# EAGLE board DWM1000_Feather (EAGLE 9.5.0)
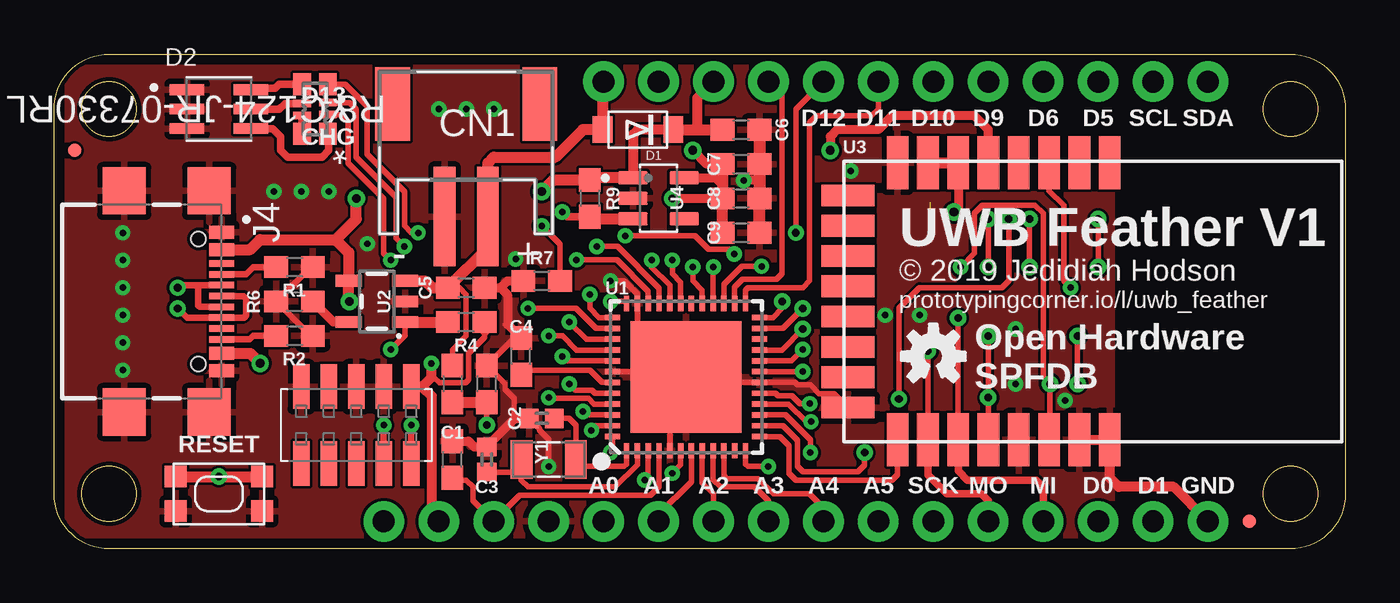
[diagram p0: board, top side]
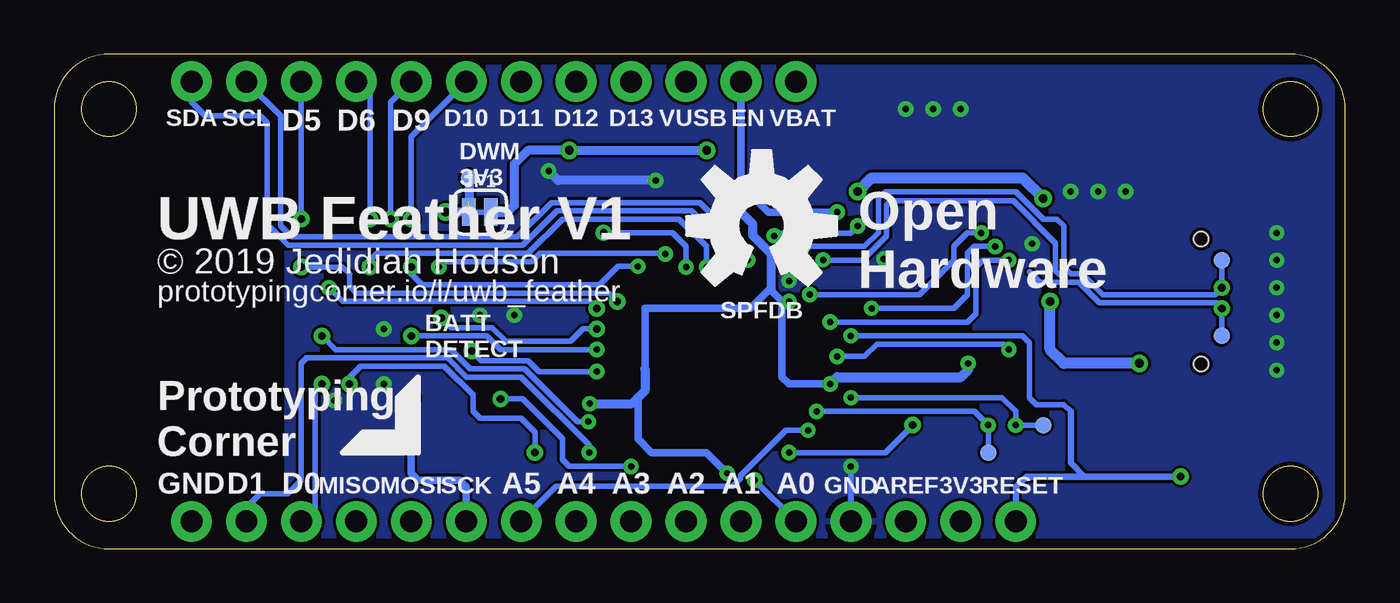
[diagram p1: board, bottom side, seen from below]

Size 59.69 x 22.86 mm. Coordinates in mm from the lower left corner, seen from the top.
Outline: 0,2.54 0,20.32 arc-90 2.54,22.86 57.15,22.86 arc-90 59.69,20.32 59.69,2.54 arc-90 57.15,0 2.54,0 arc-90 0,2.54
Outline: circle at 57.15,20.32 radius 1.27
Outline: circle at 57.15,2.54 radius 1.27
Outline: circle at 2.54,2.54 radius 1.27
Outline: circle at 2.54,20.32 radius 1.27
Copper layers (1*16): Top 0.035mm / dielectric 1.5mm / Bottom 0.035mm
Design rules "JLCPCB_DRU": minimum track width 5mil, minimum drill 0.2mm, track to track 5mil, track to pad 5mil, pad to pad 5mil, via to via 5mil, smd to smd 3.5mil, copper to edge 0.2mm, drill to drill 8mil, minimum pad ring 10mil, minimum via ring 8mil, stop-mask expansion 4mil, vias tented up to drill 40mil, thermal gap 10mil

## Footprints (pad centres in the part's own frame; a part is rotated, then mirrored left to right if it is on the bottom)
0603 = smd 1.1 x 1: 1 -0.85,0; 2 0.85,0
0402 = smd 0.85 x 0.9: 1 -0.58,0; 2 0.58,0
JST-PH-2-SMT-RA = smd 1 x 4.6: 1 1,-3.7; 2 -1,-3.7 | smd 1.6 x 3.4: NC1 -3.4,1.5; NC2 3.4,1.5
SOD-123FL = smd 0.91 x 1.22: A 1.637,0; C -1.637,0
LED_ASMT-YTD7-0AA02 = smd 1.6 x 0.5: 1 -1.475,0.9; 2 -1.475,0; 3 -1.475,-0.9; 4 1.475,-0.9; 5 1.475,0; 6 1.475,0.9
FIDUCIAL-MICRO = smd 0.635 x 0.635: 1 0,0
1X16_NO_SILK = drill 1.016 pad 1.88: 1 0,0; 2 2.54,0; 3 5.08,0; 4 7.62,0; 5 10.16,0; 6 12.7,0; 7 15.24,0; 8 17.78,0; 9 20.32,0; 10 22.86,0; 11 25.4,0; 12 27.94,0; 13 30.48,0; 14 33.02,0; 15 35.56,0; 16 38.1,0
1X12_NO_SILK = drill 1.016 pad 1.88: 1 0,0; 2 2.54,0; 3 5.08,0; 4 7.62,0; 5 10.16,0; 6 12.7,0; 7 15.24,0; 8 17.78,0; 9 20.32,0; 10 22.86,0; 11 25.4,0; 12 27.94,0
GCT_USB4110-GF-A = smd 0.6 x 1.15: A1/B12 -3.2,1.075; A4/B9 -2.4,1.075; B1/A12 3.2,1.075; B4/A9 2.4,1.075 | smd 0.3 x 1.15: A5 -1.25,1.075; A6 -0.25,1.075; A7 0.25,1.075; A8 1.25,1.075; B5 1.75,1.075; B6 0.75,1.075; B7 -0.75,1.075; B8 -1.75,1.075 | smd 2.18 x 2: S1 -5.11,0.5; S2 5.11,0.5; S3 -5.11,-3.43; S4 5.11,-3.43 | hole 0.65: -2.89,0; 2.89,0
SMT-JUMPER_2_NC_TRACE_SILK = smd 0.635 x 1.27: 1 -0.508,0; 2 0.508,0
20021221-00010C4LF = smd 0.76 x 2.05: 1 -2.54,-1.78; 2 -2.54,1.78; 3 -1.27,-1.78; 4 -1.27,1.78; 5 0,-1.78; 6 0,1.78; 7 1.27,-1.78; 8 1.27,1.78; 9 2.54,-1.78; 10 2.54,1.78
YAG_YC124 = smd 0.813 x 1.016: 1 -0.597,1.143; 4 -0.597,-1.143; 5 0.597,-1.143; 8 0.597,1.143 | smd 0.813 x 0.356: 2 -0.597,0.257; 3 -0.597,-0.298; 6 0.597,-0.257; 7 0.597,0.298
KMR2 = smd 1 x 1: 1 2,0.8; 2 2,-0.8; 3 -2,0.8; 4 -2,-0.8
PAD.03X.03 = smd 0.762 x 0.762: P$1 0,0
QFN-48 = smd 0.7 x 0.25: 1 -3.4,2.75; 2 -3.4,2.25; 3 -3.4,1.75; 4 -3.4,1.25; 5 -3.4,0.75; 6 -3.4,0.25; 7 -3.4,-0.25; 8 -3.4,-0.75; 9 -3.4,-1.25; 10 -3.4,-1.75; 11 -3.4,-2.25; 12 -3.4,-2.75; 25 3.4,-2.75; 26 3.4,-2.25; 27 3.4,-1.75; 28 3.4,-1.25; 29 3.4,-0.75; 30 3.4,-0.25; 31 3.4,0.25; 32 3.4,0.75; 33 3.4,1.25; 34 3.4,1.75; 35 3.4,2.25; 36 3.4,2.75 | smd 0.25 x 0.7: 13 -2.75,-3.4; 14 -2.25,-3.4; 15 -1.75,-3.4; 16 -1.25,-3.4; 17 -0.75,-3.4; 18 -0.25,-3.4; 19 0.25,-3.4; 20 0.75,-3.4; 21 1.25,-3.4; 22 1.75,-3.4; 23 2.25,-3.4; 24 2.75,-3.4; 37 2.75,3.4; 38 2.25,3.4; 39 1.75,3.4; 40 1.25,3.4; 41 0.75,3.4; 42 0.25,3.4; 43 -0.25,3.4; 44 -0.75,3.4; 45 -1.25,3.4; 46 -1.75,3.4; 47 -2.25,3.4; 48 -2.75,3.4 | smd 5.15 x 5.15: THERM_GND 0,0
SOT23-5 = smd 0.55 x 1.2: 1 -0.95,-1.3; 2 0,-1.3; 3 0.95,-1.3; 4 0.95,1.3; 5 -0.95,1.3
XCVR_DWM1000 = smd 2.45 x 1: 1 -6.4,1.8; 2 -6.4,0.4; 3 -6.4,-1; 4 -6.4,-2.4; 5 -6.4,-3.8; 6 -6.4,-5.2; 7 -6.4,-6.6; 8 -6.4,-8; 17 6.4,-8; 18 6.4,-6.6; 19 6.4,-5.2; 20 6.4,-3.8; 21 6.4,-2.4; 22 6.4,-1; 23 6.4,0.4; 24 6.4,1.8 | smd 1 x 2.45: 9 -4.9,-10.295; 10 -3.5,-10.295; 11 -2.1,-10.295; 12 -0.7,-10.295; 13 0.7,-10.295; 14 2.1,-10.295; 15 3.5,-10.295; 16 4.9,-10.295
SOT95P285X140-5N = smd 1.35 x 0.6: 1 -1.185,0.95; 2 -1.185,0; 3 -1.185,-0.95; 4 1.185,-0.95; 5 1.185,0.95
XTAL_FC-135_32.7680KA-A0 = smd 1 x 1.8: 1 -1.25,0; 2 1.25,0

## Placement (x,y rotation side)
C1  1uF  [0603]  18.41,4.13 90 top
C2  15pF  [0402]  22.54,6.03 0 top
C3  15pF  [0402]  20,4.13 270 top
C4  1uF  [0603]  21.59,8.89 90 top
C5  10uF  [0603]  19.05,12.06 0 top
C6  1uF  [0603]  31.75,19.37 0 top
C7  10uF  [0603]  31.75,17.78 0 top
C8  10uF  [0603]  31.75,16.19 0 top
C9  1uF  [0603]  31.75,14.61 0 top
CN1  [JST-PH-2-SMT-RA]  19.05,19.05 0 top
D1  [SOD-123FL]  26.99,19.37 180 top
D2  ASMT-YTD7-0AA02  [LED_ASMT-YTD7-0AA02]  7.62,20.32 0 top
FD1  FIDUCIALUFIDUCIAL  [FIDUCIAL-MICRO]  0.95,18.41 0 top
FD2  FIDUCIALUFIDUCIAL  [FIDUCIAL-MICRO]  55.24,1.27 0 top
J2  [1X16_NO_SILK]  53.34,1.27 180 top
J3  [1X12_NO_SILK]  53.34,21.59 180 top
J4  USB4110-GF-A  [GCT_USB4110-GF-A]  6.67,11.43 270 top
JP1  DWM_3V3  [SMT-JUMPER_2_NC_TRACE_SILK]  40.01,15.56 0 bottom
JP2  20021221-00010C4LF  [20021221-00010C4LF]  13.97,5.71 180 top
LOGO1  OSHW-LOGOL  [OSHW-LOGO-L]  26.99,14.92 0 bottom
LOGO2  OSHW-LOGOS  [OSHW-LOGO-S]  40.64,8.89 0 top
R1  5K1  [0603]  11.11,13.02 180 top
R2  5K1  [0603]  11.11,9.84 180 top
R3  100K  [0603]  18.41,7.62 270 top
R4  5K1  [0603]  19.05,10.48 180 top
R5  100K  [0603]  20,7.62 90 top
R6  5K1  [0603]  11.11,11.43 0 top
R7  100K  [0603]  22.54,12.38 0 top
R8  YC124-JR-07330RL  [YAG_YC124]  12.06,20.32 180 top
R9  10K  [0603]  24.77,16.19 270 top
SW1  SPST_TACT-KMR2  [KMR2]  7.62,2.54 180 top
TP1  TEST-POINT3  [PAD.03X.03]  5.71,9.84 0 bottom
TP2  TEST-POINT3  [PAD.03X.03]  5.71,13.34 0 bottom
TP3  TEST-POINT3  [PAD.03X.03]  16.51,4.45 0 bottom
TP4  TEST-POINT3  [PAD.03X.03]  13.97,5.71 0 bottom
TP5  TEST-POINT3  [PAD.03X.03]  40.51,17.14 0 bottom
U1  ATSAMD21G-M  [QFN-48]  29.21,7.94 90 top
U2  MCP73832  [SOT23-5]  14.92,11.43 90 top
U3  DWM1000  [XCVR_DWM1000]  46.99,11.43 270 top
U4  AP2112K-3.3TRG1  [SOT95P285X140-5N]  27.94,16.19 0 top
Y1  FC-135_32.7680KA-A0  [XTAL_FC-135_32.7680KA-A0]  22.86,4.13 180 top

## Library data of the parts
C1 C4-C9 = SparkFun-Capacitors; PROD_ID: CAP-11015
C2 C3 = SparkFun-Capacitors; PROD_ID: CAP-13063
CN1 D1 SW1 = adafruit
D2 = ASMT-YTD7-0AA02; AVAILABILITY: Unavailable; DESCRIPTION: Red, Green, Blue _RGB_ 623nm Red, 529nm Green, 469nm Blue LED Indication - Discrete 2.1V Red, 3.1V Green, 3.1V Blue 6-SMD, J-Lead; MF: Broadcom Limited; MP: ASMT-YTD7-0AA02; PACKAGE: PLCC-6 Broadcom; PRICE: None
FD1 FD2 LOGO1 LOGO2 = SparkFun-Aesthetics
J2 J3 TP1-TP5 = SparkFun-Connectors
J4 = USB4110-GF-A; AVAILABILITY: Unavailable; DESCRIPTION: USB - C _Type - C_ USB 2.0 Receptacle Connector 24 _16+8 Dummy_ Position Surface Mount, Right Angle; Through Hole; MF: GCT; MP: USB4110-GF-A; PACKAGE: None; PRICE: None
JP1 = SparkFun-Jumpers
JP2 = 20021221-00010C4LF; DESCRIPTION: Conn Shrouded Header HDR 10 POS 1.27mm Solder ST SMD T/R; DIGI-KEY_PART_NUMBER: 609-3700-1-ND; DIGI-KEY_PURCHASE_URL: https://www.digikey.com.au/product-detail/en/amphenol-icc-fci/20021221-00010C4LF/609-3700-1-ND/2209154?utm_source=snapeda&utm_medium=aggregator&utm_campaign=symbol; MF: Amphenol ICC; MP: 20021221-00010C4LF; PACKAGE: None
R1-R7 R9 = SparkFun-Resistors
R8 = YC124-JR-07330RL; BUILT_BY: EMA_UL_Team; MANUFACTURER_PART_NUMBER: YC124-JR-07330RL; VENDOR: Yageo
U1 = SparkFun-IC-Microcontroller; PROD_ID: IC-13064
U2 = SparkFun-IC-Power; PROD_ID: IC-09995
U3 = DWM1000; AVAILABILITY: Unavailable; DESCRIPTION: Mod Ieee802.15.4-2011 Uwb Txrx; MF: Decawave Limited; MP: DWM1000; PACKAGE: Module Decawave; PRICE: None
U4 = AP2112K-3.3TRG1; DESCRIPTION: AP2112 Series 0.6 A 3.3 V Fixed Output SMT LDO Linear Regulator - SOT23-5; DIGI-KEY_PART_NUMBER: AP2112K-3.3TRG1DICT-ND; DIGI-KEY_PURCHASE_URL: https://www.digikey.com.au/product-detail/en/diodes-incorporated/AP2112K-3.3TRG1/AP2112K-3.3TRG1DICT-ND/4505257?utm_source=snapeda&utm_medium=aggregator&utm_campaign=symbol; MF: Diodes Inc.; MP: AP2112K-3.3TRG1; PACKAGE: SOT-753 Diodes Inc.
Y1 = FC-135_32.7680KA-A0; DESCRIPTION: 32.7680 Khz 20ppm 12.5pf; DIGI-KEY_PART_NUMBER: SER4077CT-ND; DIGI-KEY_PURCHASE_URL: https://www.digikey.com.au/product-detail/en/epson/FC-135-32.7680KA-A0/SER4077CT-ND/5604233?utm_source=snapeda&utm_medium=aggregator&utm_campaign=symbol; MF: EPSON; MP: FC-135 32.7680KA-A0; PACKAGE: SMD-2 Epson

## Nets
3.3V: C7.1 C8.1 C9.1 J2.15 JP1.2 JP2.1 R4.1 U1.6 U1.17 U1.36 U1.44 U3.5 U4.5
A0: J2.12 U1.3
A1: J2.11 U1.7
A2: J2.10 U1.8
A3: J2.9 U1.9
A4: J2.8 U1.10
A5: J2.7 U1.47
AREF: C1.1 J2.14 U1.4
BATT_S: R4.2 U1.41 U2.1
BATT_V: R3.2 R5.1 U1.48
D0: J2.3 U1.16
D1: J2.2 U1.15
D2: U1.23 U3.3
D3: R7.2 U1.14 U3.22
D4: U1.13 U3.17
D5: J3.3 U1.24
D6: J3.4 U1.29
D7: U1.30
D8: U1.11
D9: J3.5 U1.12
D10: J3.6 U1.27
D11: J3.7 U1.25
D12: J3.8 U1.28
D13: J3.9 U1.26
D+: J4.A6 J4.B6 TP1.P$1 U1.34
D-: J4.A7 J4.B7 TP2.P$1 U1.33
DWM_3V3: JP1.1 TP5.P$1 U3.6 U3.7
EN: J3.11 R9.2 U4.3
GND: C1.2 C2.1 C3.1 C4.2 C5.2 C6.2 C7.2 C8.2 C9.2 CN1.2 D2.1 D2.2 D2.3 J2.1 J2.13 J4.A1/B12 J4.B1/A12 J4.S1 J4.S2 J4.S3 J4.S4 JP2.3 JP2.5 JP2.9 R1.1 R2.1 R5.2 R6.1 R7.1 SW1.1 SW1.3 U1.5 U1.18 U1.35 U1.42 U1.THERM_GND U2.2 U3.8 U3.16 U3.21 U3.23 U3.24 U4.2
MISO: J2.4 U1.21 U3.19
MOSI: J2.5 U1.19 U3.18
N$1: D2.6 R8.5
N$3: D2.5 R8.6
N$4: R8.7 R8.8
N$5: D2.4 R8.1
N$6: R6.2 U2.5
N$8: J4.A5 R1.2
N$10: J4.B5 R2.2
N$15: C2.2 U1.1 Y1.1
N$16: C4.1 U1.43
N$17: C3.2 U1.2 Y1.2
RESET: J2.16 SW1.2 SW1.4 U1.40
RGB_B: R8.4 U1.37
RGB_G: R8.3 U1.38
RGB_R: R8.2 U1.39
SCK: J2.6 U1.20 U3.20
SCL: J3.2 U1.32
SDA: J3.1 U1.31
SWCLK: JP2.4 TP4.P$1 U1.45
SWDIO: JP2.2 TP3.P$1 U1.46
V_BATT: C5.1 CN1.1 D1.A J3.12 R3.1 U2.3
V_USB: C6.1 D1.C J3.10 J4.A4/B9 J4.B4/A9 R9.1 U2.4 U4.1

## Tracks (layer width: path | path; a pad name or v marks a point on that pad's centre or on a via)
3.3V  (via drill 0.3, 0.3 pad 0.6, 0.35, 0.4)
  Top 0.254: U1.17 33.34,7.19 | 33.35,7.19 33.34,7.19 | U1.6 28.96,3.88 v28.57,3.49 | U1.44 25.01,7.19 24.86,7.34 24.09,7.34 v23.81,7.62 | U1.36 26.37,11.43 v25.72,11.43 | 33.34,7.19 33.46,7.07 34.11,7.07 34.47,6.71 v34.92,6.71 | R4.1 19.9,9.78 19.17,9.05 19.17,7.82 19.02,7.67 17.81,7.67 17.57,7.91 17.43,7.91
  Top 0.406: U3.5 43.18,19.37 42.55,20 38.73,20 38.1,19.37 36.2,19.37 35.88,19.05 v35.88,18.41 | U4.5 30.16,17.14 30.58,17.14 30.9,16.83 | C7.1 30.16,17.78 v29.53,18.41 | v28.57,16.19 C8.1
  Top 0.457: 19.9,10.06 R4.1 | v17.43,8.57 17.43,7.91 17.02,7.5 | 17.02,7.5 JP2.1 | J2.15 17.46,1.59 17.46,7.05 17.02,7.5
  Top 0.508: C9.1 C8.1 30.9,16.83 C7.1 | U3.5
  Bottom 0.356: v25.72,11.43 26.04,11.43 | 26.04,11.43 26.54,11.94 26.54,12.06 27.5,11.11 32.38,11.11 32.38,8.32 | v28.57,3.49 29.53,4.45 32.07,4.45 32.7,5.08 32.7,6.99 | v23.81,7.62 25.72,7.62 26.04,7.94 26.04,11.43
  Bottom 0.406: v29.53,18.41 v35.88,18.41 37.78,18.41 38.42,17.78 38.42,15.88 38.73,15.56 JP1.2 | v28.57,16.19 27.4,15.02 27.4,14.5 26.54,13.64 26.54,11.94 | v34.92,6.71 32.98,6.71 32.7,6.99 32.38,7.3 32.38,8.32
  Bottom 0.457: v23.81,7.62 23.5,7.94 17.78,7.94 17.43,8.28 v17.43,8.57
A0  (via drill 0.3 pad 0.6)
  Top 0.254: U1.3 27.46,3.33 v27.3,3.17
  Bottom 0.254: v27.3,3.17 J2.12
A1
  Top 0.254: U1.7 29.46,3.11 27.94,1.59 J2.11
A2
  Top 0.254: U1.8 29.96,3.06 30.48,2.54 J2.10
A3
  Top 0.254: U1.9 30.46,3.19 30.8,2.86 32.38,2.86 33.02,2.22 J2.9
A4
  Top 0.254: U1.10 30.96,3.39 31.11,3.24 32.54,3.24 33.24,2.54 34.92,2.54 35.56,1.91 J2.8
A5  (via drill 0.3 pad 0.6)
  Top 0.254: U1.47 25.05,5.69 v24.84,5.47
  Bottom 0.254: v24.84,5.47 25.86,5.47 27.97,3.37 27.97,3.24 28.32,2.88 36.48,2.88 J2.7
AREF
  Top 0.254: C1.1 18.52,3.17 19.05,3.17 19.37,2.86 19.37,2.22 J2.14 21.53,2.48 27.56,2.48 27.96,2.88 U1.4
BATT_S  (via drill 0.3)
  Top 0.254: U1.41 23.7,8.69 v23.5,8.89 | v15.56,9.21 16.22,9.87 U2.1
  Top 0.508: U2.1 R4.2
  Bottom 0.254: v23.5,8.89 22.23,8.89 21.65,9.46 15.81,9.46 v15.56,9.21
BATT_V  (via drill 0.3 pad 0.6, 0.35)
  Top 0.254: U1.48 25.81,4.54 v25.72,4.45 | v20,5.71 R5.1
  Top 0.508: R3.2 R5.1
  Bottom 0.254: v25.72,4.45 21.27,4.45 v20,5.71
D0  (via drill 0.3, 0.35)
  Top 0.254: v47.31,9.84 v47.31,7.62 | U1.16 33.95,6.69 34.77,5.87 v34.99,5.87
  Bottom 0.254: v47.31,9.84 46.67,9.21 41.34,9.21 40.45,8.32 37.94,8.32 35.5,5.87 v34.99,5.87 | v47.31,7.62 47.62,7.3 47.62,1.91 J2.3
D1  (via drill 0.3)
  Top 0.254: U1.15 33.82,6.19 34.96,5.04 v34.96,4.45
  Bottom 0.254: J2.2 50.8,1.91 50.16,2.54 48.9,2.54 48.26,3.17 48.26,8.57 48.01,8.83 41.5,8.83 40.61,7.94 38.1,7.94 34.96,4.8 v34.96,4.45
D2  (via drill 0.3, 0.35)
  Top 0.254: U1.23 33.68,10.19 v34.61,11.11 | U3.3 45.99,16.56 46.67,15.88 46.67,12.38 v46.99,12.06
  Bottom 0.254: v34.61,11.11 34.92,11.43 46.35,11.43 v46.99,12.06
D3  (via drill 0.3, 0.35)
  Top 0.254: U1.14 33.68,5.69 34.35,5.02 34.35,3.81 34.61,3.56 37.15,3.56 37.47,3.87 v37.47,4.45 | 46.04,5.08 v46.04,7.62 45.72,7.94 45.72,15.5 45.35,15.87 42.92,15.87 42.55,15.5 42.55,13.65 v41.91,13.02 | R7.2 23.39,14.07 v22.54,14.92 | v31.43,13.62 31.21,13.85 30.25,13.85 29.63,14.46 v26.4,14.46
  Top 0.305: 46.04,5.08 U3.22
  Bottom 0.254: v37.47,4.45 37.47,5.4 38.1,6.03 40.01,6.03 40.32,6.35 40.32,7.11 41.66,8.45 45.53,8.45 46.04,7.94 v46.04,7.62 | v41.91,13.02 41.66,13.27 37.62,13.27 37.24,13.66 31.47,13.66 v31.43,13.62 | v22.54,14.92 22.89,14.58 26.29,14.58 v26.4,14.46
D4
  Top 0.254: U1.13 33.55,5.19 33.97,4.76 33.97,3.49 34.29,3.17 38.73,3.17 38.99,3.43 U3.17
D5  (via drill 0.35)
  Top 0.254: U1.24 33.23,10.69 33.66,11.11 v33.66,11.43 | v48.26,13.02 v48.26,15.24
  Bottom 0.254: v33.66,11.43 34.04,11.81 45.72,11.81 46.04,12.13 46.04,12.7 46.35,13.02 v48.26,13.02 | v48.26,15.24 J3.3
D6  (via drill 0.3, 0.35)
  Top 0.254: v45.09,13.02 v45.09,15.24 | U1.29 29.96,11.95 29.53,12.38 v29.53,13.02
  Bottom 0.254: v45.09,13.02 45.09,13.34 44.77,13.65 37.78,13.65 36.2,15.24 30.8,15.24 29.53,13.97 v29.53,13.02 | v45.09,15.24 45.09,20.95 J3.4
D9  (via drill 0.3 pad 0.6, 0.35)
  Top 0.254: U1.12 31.96,3.92 32.07,3.81 v33.02,3.81 | v39.05,6.92 39.05,11.11 40.01,12.06 43.81,12.06 44.13,12.38 v44.13,15.24
  Bottom 0.254: v33.02,3.81 35.88,3.81 36.2,4.13 36.2,5.08 38.04,6.92 v39.05,6.92 | v44.13,15.24 44.13,20.64 J3.5
D10  (via drill 0.3, 0.35)
  Top 0.254: v43.18,15.24 v43.18,13.02 | U1.27 30.96,12.23 31.79,13.05 v32.7,13.05
  Bottom 0.254: J3.6 43.18,19.05 v43.18,15.24 | v43.18,13.02 43.18,12.7 42.67,12.19 34.48,12.19 33.62,13.05 v32.7,13.05
D11
  Top 0.254: J3.7 38.1,20.32 37.78,20 35.24,20 34.92,19.68 34.92,12.38 34.61,12.06 32.07,12.06 31.96,11.96 U1.25
D12  (via drill 0.3, 0.35)
  Top 0.254: J3.8 34.29,20.32 v34.29,14.61 | U1.28 30.46,13 v30.48,13.02
  Bottom 0.254: v34.29,14.61 31.11,14.61 30.48,13.97 v30.48,13.02
D13
  Top 0.254: J3.9 33.66,20.95 33.66,12.7 33.4,12.45 31.81,12.45 31.46,12.09 U1.26
D+  (via drill 0.3, 0.35)
  Top 0.254: v24.15,13.36 26.02,13.36 27.46,11.91 U1.34
  Top 0.305: J4.A6 8.77,11.68 8.89,11.56 8.89,10.79 8.78,10.68 J4.B6 6.15,10.68 v5.71,11.11
  Bottom 0.254: 14.61,12.8 14.13,12.32 13.02,12.32 | 13.02,12.32 12.32,12.32 11.37,11.37 5.97,11.37 v5.71,11.11 TP1.P$1 | v24.15,13.36 24.13,13.34 22.32,13.34 21.21,14.45 21.21,15.88 21,16.08 15.35,16.08 13.4,14.13 13.4,12.86 13.02,12.48 13.02,12.32
D-  (via drill 0.3, 0.35)
  Top 0.254: v25.08,13.97 26.04,13.97 27.96,12.04 U1.33
  Top 0.305: J4.B7 6.78,12.18 | 6.78,12.18 6.67,12.06 6.67,11.24 6.73,11.18 J4.A7 | 6.78,12.18 5.83,12.18 v5.71,12.06
  Bottom 0.254: v25.08,13.97 22.23,13.97 21.59,14.61 21.59,16.19 21.27,16.51 15.24,16.51 13.97,15.24 13.34,15.24 13.02,14.92 13.02,13.02 12.7,12.7 12.16,12.7 11.21,11.75 6.03,11.75 v5.71,12.06 TP2.P$1
DWM_3V3  (via drill 0.4)  (1 unrouted)
  Top 0.406: U3.6 41.79,15.76 v41.59,15.56
  Top 0.508: U3.7 U3.6
  Bottom 0.406: TP5.P$1 40.51,16.02 | JP1.1 v41.59,15.56
EN  (via drill 0.3)
  Top 0.305: R9.2 24.86,15.24
  Top 0.356: R9.2 23.71,15.34 v23.5,15.56
  Top 0.508: 24.86,15.24 U4.3
  Bottom 0.356: v23.5,15.56 26.67,15.56 27.94,16.83 J3.11
GND  (via drill 0.3, 0.3 pad 0.6)
  Top 0.254: 29.53,7.69 U1.18 34.25,7.69 34.36,7.58 34.96,7.58 35.37,7.18 36.05,7.18 U3.16 | 29.53,7.69 29.46,7.69 U1.THERM_GND 28.96,8.19 27.3,8.19 | U1.5 28.46,6.62 29.53,7.69 | U1.42 27.3,8.19 | 27.3,8.19 26.96,8.53 U1.35 26.96,11.78 26.35,12.38 v25.72,12.38 | R1.1 11.85,13.02 R6.1 11.85,9.84 R2.1 | 21.27,5.98 21.27,6.95 20.84,7.38 20.84,7.64 R5.2 21.27,9.74 C4.2 | C2.1 22.44,5.55 22.44,5.48 22.86,5.06 v22.86,3.81
  Top 0.406: 32.6,17.14 32.48,17.02 v31.87,17.02 | C5.2 20.64,12.06 | 20.64,12.06 20.95,12.38 R7.1 | 20.64,12.06 20.95,11.75 20.95,10.38 C4.2 | C1.2 19.15,4.98 19.42,4.71 C3.1 21.27,5.98 21.27,6.03 C2.1
  Top 0.457: J2.1 51.75,2.86 49.21,2.86 48.79,3.28 U3.24 U3.23
  Top 0.559: C9.2 C8.2 32.6,17.14 C7.2 C6.2
  Bottom 0.254: v22.86,3.81 J2.13
  Bottom 0.406: v31.87,17.02 36.39,17.02 v36.83,17.46
  other vias: 3.17,8.26 3.17,9.53 3.17,10.79 3.17,12.06 3.17,13.34 3.17,14.61 10.16,16.51 11.43,16.51 12.7,16.51 17.78,20.32 19.05,20.32 20.32,20.32 44.45,10.16 44.45,7.62 46.74,6.86 38.42,10.79 40.01,10.79 21.34,13.4 14.48,14.1
  pour Bottom: 0.64,22.23 48.9,22.23 48.9,0.64 0.64,0.64
  pour Top: 0.64,22.23 0.64,0.64 48.9,0.64 48.9,22.23
MISO  (via drill 0.35)
  Top 0.254: U1.21 33.63,9.19 v34.61,10.16 | v41.78,10.67 U3.19
  Top 0.356: U3.19 41.79,3.61 42.23,3.17 45.4,3.17 45.72,2.86 J2.4
  Bottom 0.254: v34.61,10.16 35.24,10.16 35.81,9.59 38.8,9.59 39.43,10.22 41.34,10.22 v41.78,10.67
MOSI  (via drill 0.3 pad 0.6, 0.35)
  Top 0.254: U1.19 v34.61,8.19 | v40.39,9.14 U3.18
  Top 0.356: U3.18 40.39,3.42 41.27,2.54 42.86,2.54 43.18,2.22 J2.5
  Bottom 0.254: v34.61,8.19 37.27,8.19 37.78,8.7 39.94,8.7 v40.39,9.14
N$1
  Top 0.356: D2.6 9.15,21.27 10.22,21.27 10.41,21.46 R8.5
N$3
  Top 0.356: R8.6 10.67,20.58 10.41,20.32 D2.5
N$4
  Top 0.356: R8.7 R8.8
N$5
  Top 0.356: R8.1 12.7,19.14 12.7,18.41 12.38,18.1 10.79,18.1 10.48,18.41 10.48,19.05 10.11,19.42 D2.4
N$6
  Top 0.406: U2.5 12.91,10.48 R6.2
N$8
  Top 0.305: J4.A5 8.87,12.68 9.21,13.02 R1.2
N$10
  Top 0.305: J4.B5 9.04,9.68 9.21,9.84 R2.2
N$15
  Top 0.254: U1.1 26.46,3.92 26.35,3.81 24.43,3.81 Y1.1 24.13,4.15 24.13,5.71 23.81,6.03 C2.2
N$16
  Top 0.254: U1.43 25.33,7.69 24.77,8.26 21.8,8.26 C4.1
N$17
  Top 0.254: C3.2 21.33,3.55 21.91,4.13 Y1.2 21.59,4.11 21.59,3.17 21.91,2.86 25.94,2.86 26.96,3.88 U1.2
RESET  (via drill 0.3, 0.35)
  Top 0.254: U1.40 24.15,9.19 23.5,9.84 v22.86,9.84
  Top 0.508: SW1.2 v7.62,3.34 SW1.4
  Bottom 0.254: 12.7,6.35 13.02,6.67 14.29,6.67 14.61,6.99 14.61,9.53 14.92,9.84 v22.86,9.84
  Bottom 0.305: J2.16 15.24,2.86 14.76,3.34 12.06,3.34 | 12.06,3.34 v7.62,3.34 | 12.06,3.34 12.7,3.98 12.7,6.35
RGB_B  (via drill 0.3)
  Top 0.254: R8.4 13.46,21.46 14.48,20.45 14.48,18.22 16.19,16.51 16.19,14.92 16.51,14.61 v16.83,14.61 | U1.37 25.19,10.69 24.77,11.11 v24.77,11.75
  Bottom 0.254: v16.83,14.61 17.46,14.61 18.1,13.97 18.1,13.34 19.68,11.75 v24.77,11.75
RGB_G  (via drill 0.3)
  Top 0.254: R8.3 13.67,20.62 13.97,20.32 13.97,18.09 15.81,16.24 15.81,14.35 v16.19,13.97 | U1.38 25.05,10.19 24.13,11.11 v21.91,11.11
  Bottom 0.254: v21.91,11.11 18.1,11.11 17.46,11.75 17.46,13.65 17.14,13.97 v16.19,13.97
RGB_R  (via drill 0.3)
  Top 0.254: U1.39 24.6,9.69 v23.81,10.48 | R8.2 13.28,20.06 13.59,19.75 13.59,17.82 15.24,16.17 15.24,13.65 v15.56,13.34
  Bottom 0.254: v15.56,13.34 16.76,13.34 17.08,13.02 17.08,10.86 17.46,10.48 v23.81,10.48
SCK  (via drill 0.3 pad 0.6, 0.35)
  Top 0.254: U1.20 34.09,8.69 v34.61,9.21 | v43.18,9.84 v43.18,6.99 U3.20
  Bottom 0.254: v43.18,9.84 39.69,9.84 39.05,9.21 v34.61,9.21
  Bottom 0.356: J2.6 40.64,2.86 40.96,3.17 42.86,3.17 43.18,3.49 v43.18,6.99
SCL  (via drill 0.3)
  Top 0.254: U1.32 28.46,12.18 27.62,13.02 v27.62,13.34
  Bottom 0.254: J3.2 49.21,20 49.21,14.92 48.7,14.41 38.29,14.41 36.7,16 29.84,16 27.62,13.78 v27.62,13.34
SDA  (via drill 0.3)
  Top 0.254: U1.31 28.96,12.31 28.57,12.7 v28.57,13.34
  Bottom 0.254: J3.1 53.34,20.64 52.7,20 50.16,20 49.85,19.68 49.85,15.02 48.86,14.03 38.04,14.03 36.45,15.62 30.23,15.62 28.57,13.97 v28.57,13.34
SWCLK  (via drill 0.3 pad 0.6)
  Top 0.254: U1.45 24.97,6.69 24.7,6.96 22.89,6.96 v22.86,6.99
  Top 0.305: JP2.4 v15.24,5.71
  Bottom 0.254: v22.86,6.99 15.88,6.99 15.24,6.35 v15.24,5.71 TP4.P$1
SWDIO  (via drill 0.3 pad 0.6)
  Top 0.254: U1.46 24.61,6.19 v24.45,6.35
  Top 0.305: JP2.2 v16.51,5.71
  Bottom 0.254: v24.45,6.35 17.14,6.35 v16.51,5.71 TP3.P$1
V_BATT
  Top 0.254: C5.1 18.73,12.06 19.05,11.75 19.05,9.84 18.41,9.21 R3.1
  Top 0.508: J3.12 25.35,21.54 D1.A 24.45,19.37 23.18,18.1 20.32,18.1 20.05,17.83 CN1.1 20.05,13.91 C5.1 17.46,12.06 17.15,12.38 U2.3 | R3.1 18.2,8.26
V_USB  (via drill 0.4)
  Top 0.457: D1.C 26.99,19.37 26.75,19.14 U4.1 | J3.10 29.72,20.83 29.72,19.37
  Top 0.508: U4.1 24.86,17.14 R9.1 23.07,17.04 v22.54,16.51 | D1.C 29.72,19.37 C6.1 | J4.A4/B9 9.07,13.83 9.53,14.29 13.02,14.29 | 13.02,14.29 13.62,13.68 U2.4 13.62,11.46 v13.65,11.43 | v13.97,16.19 13.97,15.24 13.02,14.29 | J4.B4/A9 9.07,9.03 v9.53,8.57
  Bottom 0.508: v22.54,16.51 21.91,17.14 14.92,17.14 v13.97,16.19 | v9.53,8.57 13.02,8.57 13.65,9.21 v13.65,11.43

## Text on the board
tPlace: D13 | D12 | D11 | D10 | D9 | D6 | D5 | SCL | SDA | CHG | UWB Feather V1 | © 2019 Jedidiah Hodson | prototypingcorner.io/l/uwb_feather | Open Hardware / SPFDB | RESET | A0 | A1 | A2 | A3 | A4 | A5 | SCK | MO | MI | D0 | D1 | GND
bPlace: VBAT | EN | VUSB | D13 | D12 | D11 | D10 | D9 | D6 | D5 | SCL | SDA | DWM / 3V3 | Open / Hardware | UWB Feather V1 | © 2019 Jedidiah Hodson | SPFDB | prototypingcorner.io/l/uwb_feather | BATT / DETECT | Prototyping / Corner | RESET | 3V3 | AREF | GND | A0 | A1 | A2 | A3 | A4 | A5 | SCK | MOSI | MISO | D0 | D1 | GND
tDocu: VBAT | EN | VUSB | D13 | RESET | 3V3 | AREF | GND